# EAGLE board Ex Protection (EAGLE 7.5.0)
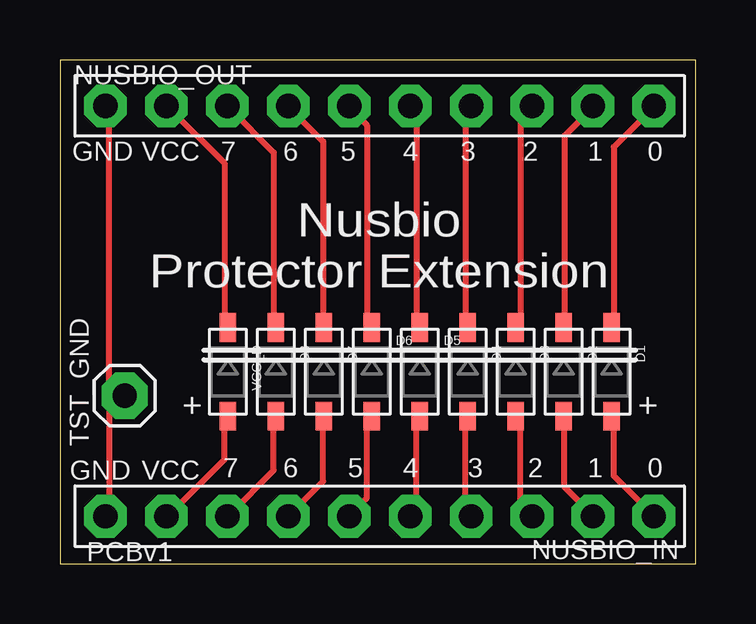
[diagram p0: board, top side]

Size 26.5 x 21 mm. Coordinates in mm from the lower left corner, seen from the top.
Outline: 26.5,0 26.5,21 0,21 0,0 26.5,0
Copper layers (1*16): Top 0.035mm / dielectric 1.5mm / Bottom 0.035mm
Design rules "default": minimum track width 10mil, minimum drill 24mil, track to track 8mil, track to pad 8mil, pad to pad 8mil, via to via 8mil, smd to smd 8mil, copper to edge 40mil, drill to drill 8mil, minimum pad ring 10mil, minimum via ring 8mil, stop-mask expansion 4mil, vias tented up to drill 0mil, thermal gap 10mil

## Footprints (pad centres in the part's own frame; a part is rotated, then mirrored left to right if it is on the bottom)
SOD-123 = smd 1.2 x 0.7: A 1.85,0; C -1.85,0
1X10-BIG = drill 1.016 pad 1.778 octagon: 1 -11.43,0; 2 -8.89,0; 3 -6.35,0; 4 -3.81,0; 5 -1.27,0; 6 1.27,0; 7 3.81,0; 8 6.35,0; 9 8.89,0; 10 11.43,0
1X01 = drill 1.016 pad 1.93 octagon: 1 0,0

## Placement (x,y rotation side)
D1  [SOD-123]  23,8 270 top
D2  [SOD-123]  21,8 270 top
D3  [SOD-123]  19,8 270 top
D4  [SOD-123]  17,8 270 top
D5  [SOD-123]  15,8 270 top
D6  [SOD-123]  13,8 270 top
D7  [SOD-123]  11,8 270 top
D8  [SOD-123]  9,8 270 top
NUSBIO_IN  PINHD-1X10  [1X10-BIG]  13.33,1.97 180 top
NUSBIO_OUT  PINHD-1X10  [1X10-BIG]  13.33,19.09 180 top
TST_GND  [1X01]  2.7,7 0 top
VCC_D  [SOD-123]  7,8 270 top

## Library data of the parts
D1-D8 NUSBIO_IN NUSBIO_OUT TST_GND VCC_D = adafruit

## Nets
1_D: D1.C NUSBIO_OUT.1
2_D: D2.C NUSBIO_OUT.2
3_D: D3.C NUSBIO_OUT.3
4_D: D4.C NUSBIO_OUT.4
5_D: D5.C NUSBIO_OUT.5
6_D: D6.C NUSBIO_OUT.6
7_D: D7.C NUSBIO_OUT.7
8_D: D8.C NUSBIO_OUT.8
GND: NUSBIO_IN.10 NUSBIO_OUT.10 TST_GND.1
N$1: D1.A NUSBIO_IN.1
N$2: D2.A NUSBIO_IN.2
N$3: D3.A NUSBIO_IN.3
N$4: D4.A NUSBIO_IN.4
N$5: D5.A NUSBIO_IN.5
N$6: D6.A NUSBIO_IN.6
N$7: D7.A NUSBIO_IN.7
N$8: D8.A NUSBIO_IN.8
N$9: NUSBIO_IN.9 VCC_D.A
VCC_D: NUSBIO_OUT.9 VCC_D.C

## Tracks (layer width: path | path; a pad name or v marks a point on that pad's centre or on a via)
1_D
  Top 0.254: D1.C 23.09,10.06 23.09,17.37 24.69,18.97 NUSBIO_OUT.1
2_D
  Top 0.254: D2.C 21.03,10.06 21.03,17.83 22.17,18.97 NUSBIO_OUT.2
3_D
  Top 0.254: D3.C 19.2,10.06 19.2,18.52 19.66,18.97 NUSBIO_OUT.3
4_D
  Top 0.254: D4.C 16.92,10.06 16.92,18.97 NUSBIO_OUT.4
5_D
  Top 0.254: D5.C 14.86,10.06 14.86,18.75 14.63,18.97 NUSBIO_OUT.5
6_D
  Top 0.254: D6.C 12.8,10.06 12.8,18.29 12.12,18.97 NUSBIO_OUT.6
7_D
  Top 0.254: D7.C 10.97,10.06 10.97,17.6 9.6,18.97 NUSBIO_OUT.7
8_D
  Top 0.254: D8.C 8.91,10.06 8.91,17.14 7.09,18.97 NUSBIO_OUT.8
GND
  Top 0.254: NUSBIO_IN.10 2.06,2.06 2.06,6.4 2.52,6.86 TST_GND.1 2.52,7.09 2.06,7.54 2.06,18.97 NUSBIO_OUT.10
N$1
  Top 0.254: D1.A 23.09,5.94 23.09,3.66 24.69,2.06 NUSBIO_IN.1
N$2
  Top 0.254: D2.A 21.03,5.94 21.03,3.2 22.17,2.06 NUSBIO_IN.2
N$3
  Top 0.254: D3.A 19.2,5.94 19.2,2.52 19.66,2.06 NUSBIO_IN.3
N$4
  Top 0.254: D4.A 16.92,5.94 16.92,2.06 NUSBIO_IN.4
N$5
  Top 0.254: D5.A 14.86,5.94 14.86,2.29 14.63,2.06 NUSBIO_IN.5
N$6
  Top 0.254: D6.A 12.8,5.94 12.8,2.74 12.12,2.06 NUSBIO_IN.6
N$7
  Top 0.254: D7.A 10.97,5.94 10.97,3.43 9.6,2.06 NUSBIO_IN.7
N$8
  Top 0.254: D8.A 8.91,5.94 8.91,3.89 7.09,2.06 NUSBIO_IN.8
N$9
  Top 0.254: VCC_D.A 6.86,5.94 6.86,4.34 4.57,2.06 NUSBIO_IN.9
VCC_D
  Top 0.254: VCC_D.C 6.86,10.06 6.86,16.69 4.57,18.97 NUSBIO_OUT.9

## Text on the board
tNames: GND | VCC | 7 | 6 | 5 | 4 | 3 | 2 | 1 | 0 | Nusbio / Protector Extension | + | + | GND | VCC | 7 | 6 | 5 | 4 | 3 | 2 | 1 | 0 | PCBv1
bNames: MadeInTheUSB.net